# Altium PCB Atmaca.PcbDoc
Units mil, origin at the board's own origin, x right, y up, seen from the top; angles counter-clockwise.
Board outline 2506.53 x 2012.01 mil, 2 copper layers (Top Layer, Bottom Layer); 28 components, 25 nets, 130 pads, 6 vias.
Unrouted connection lines stored in the file: 21.
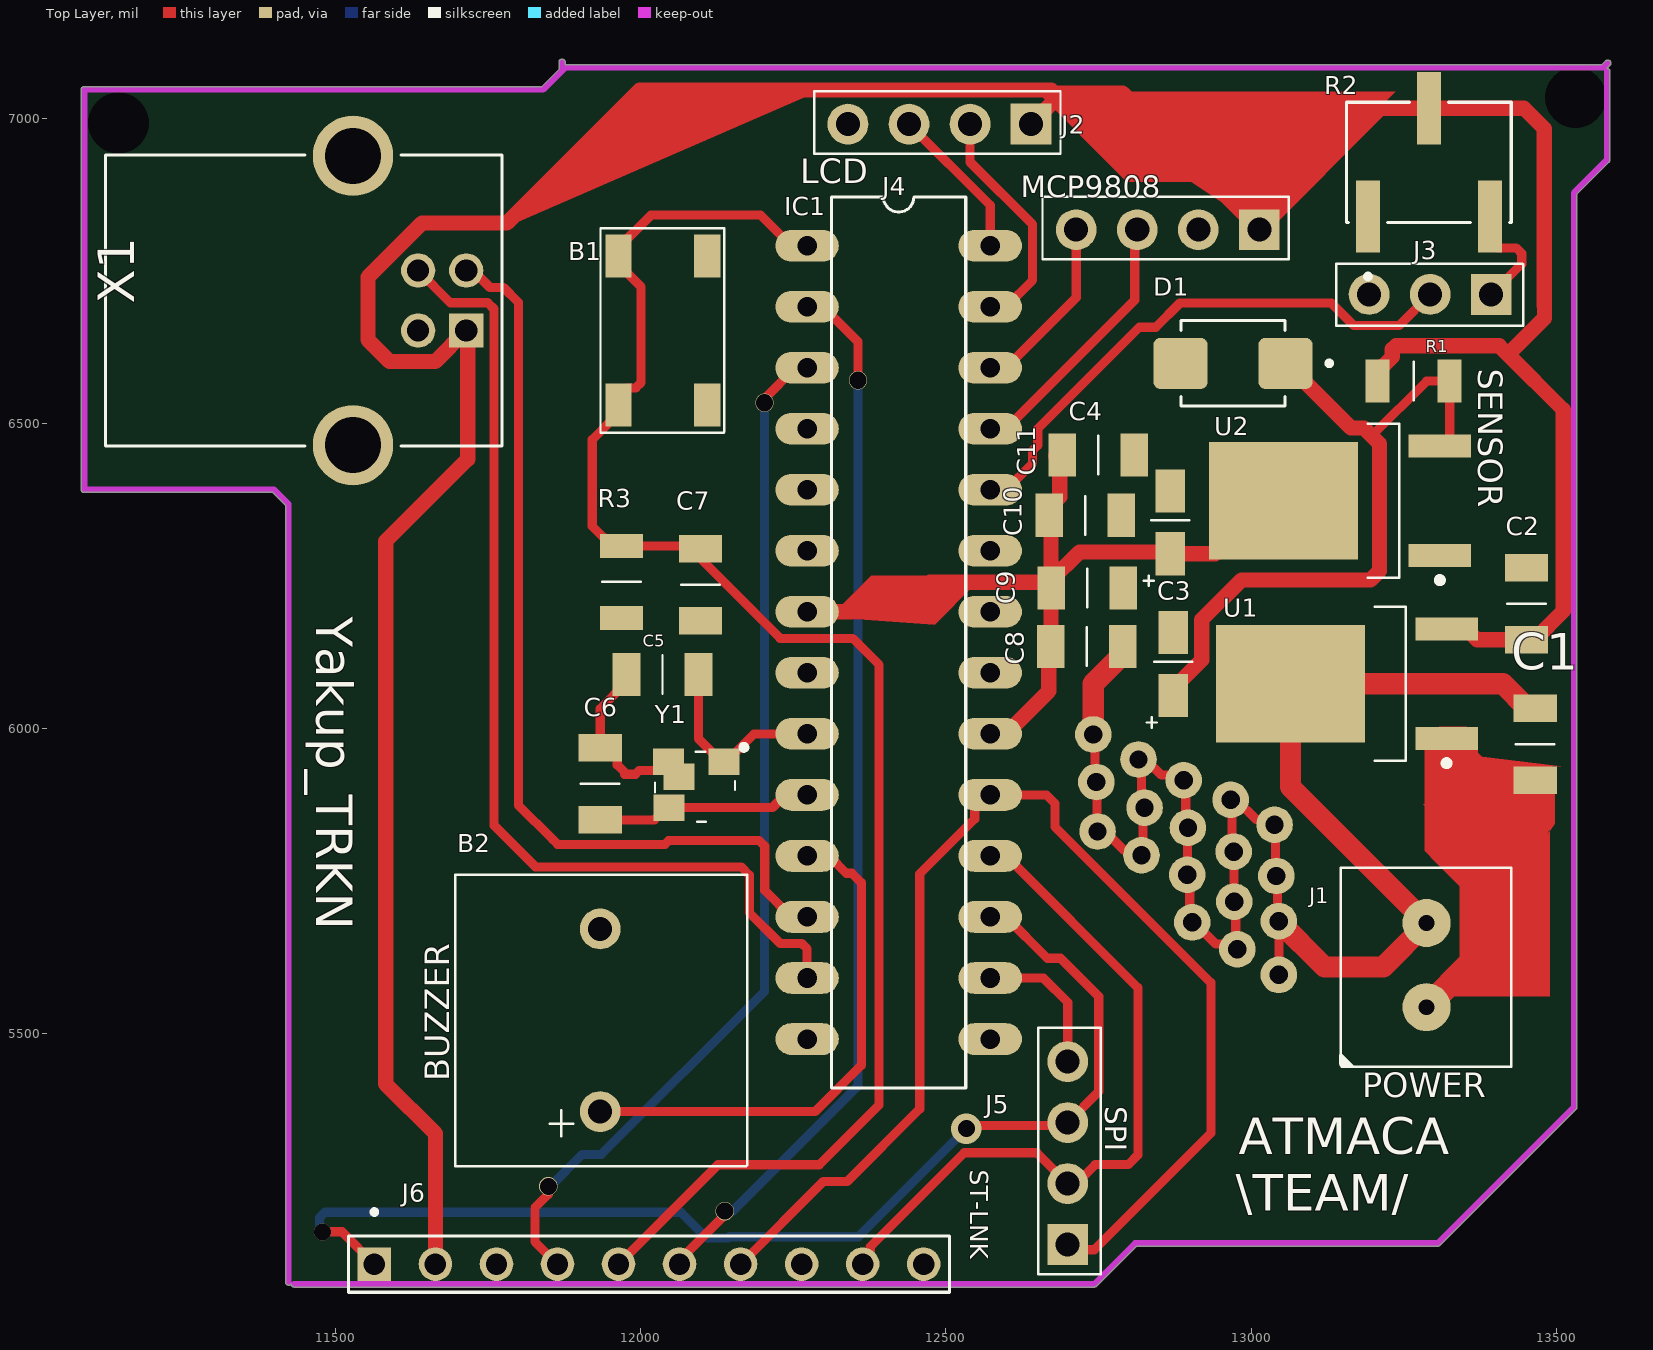
[diagram p0: Top Layer view]
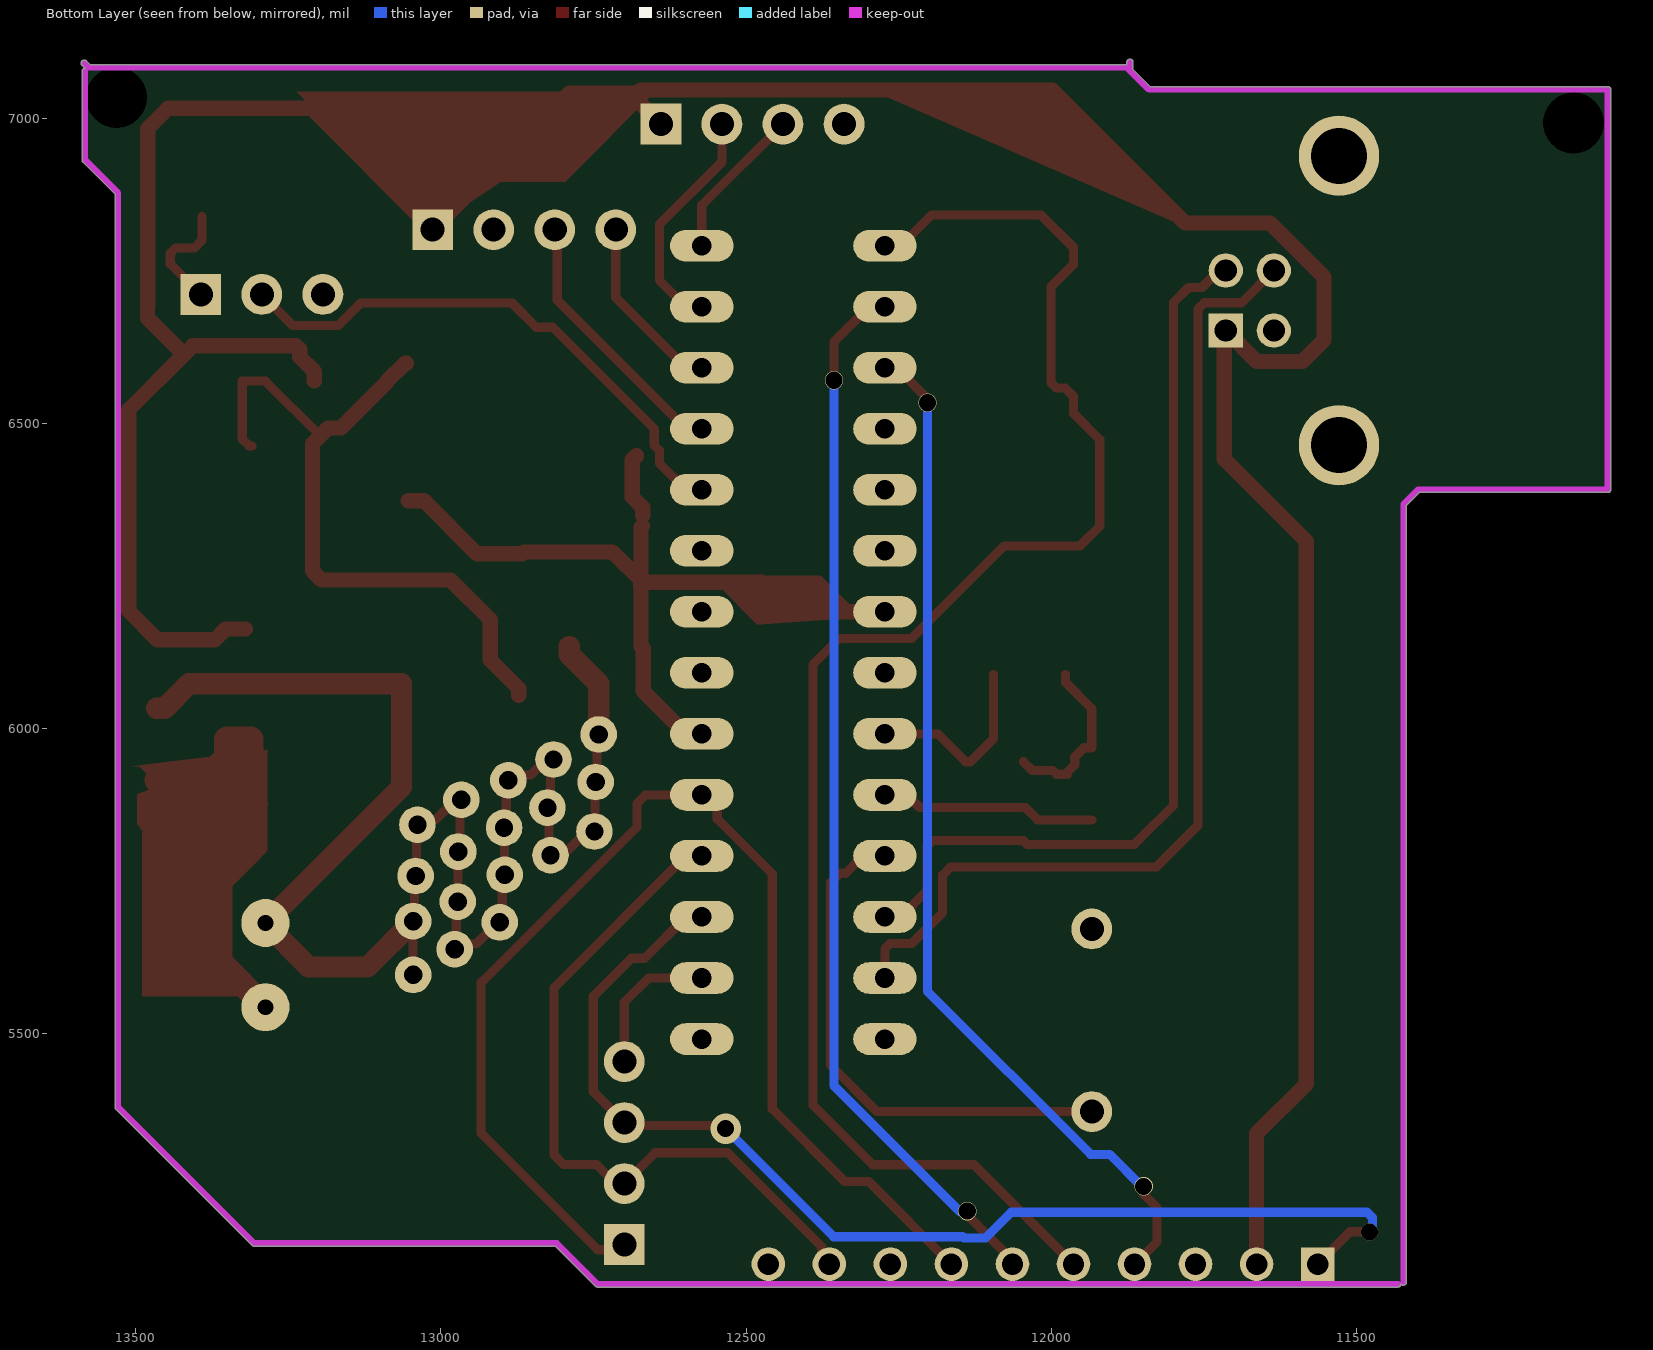
[diagram p1: Bottom Layer view, seen from below]
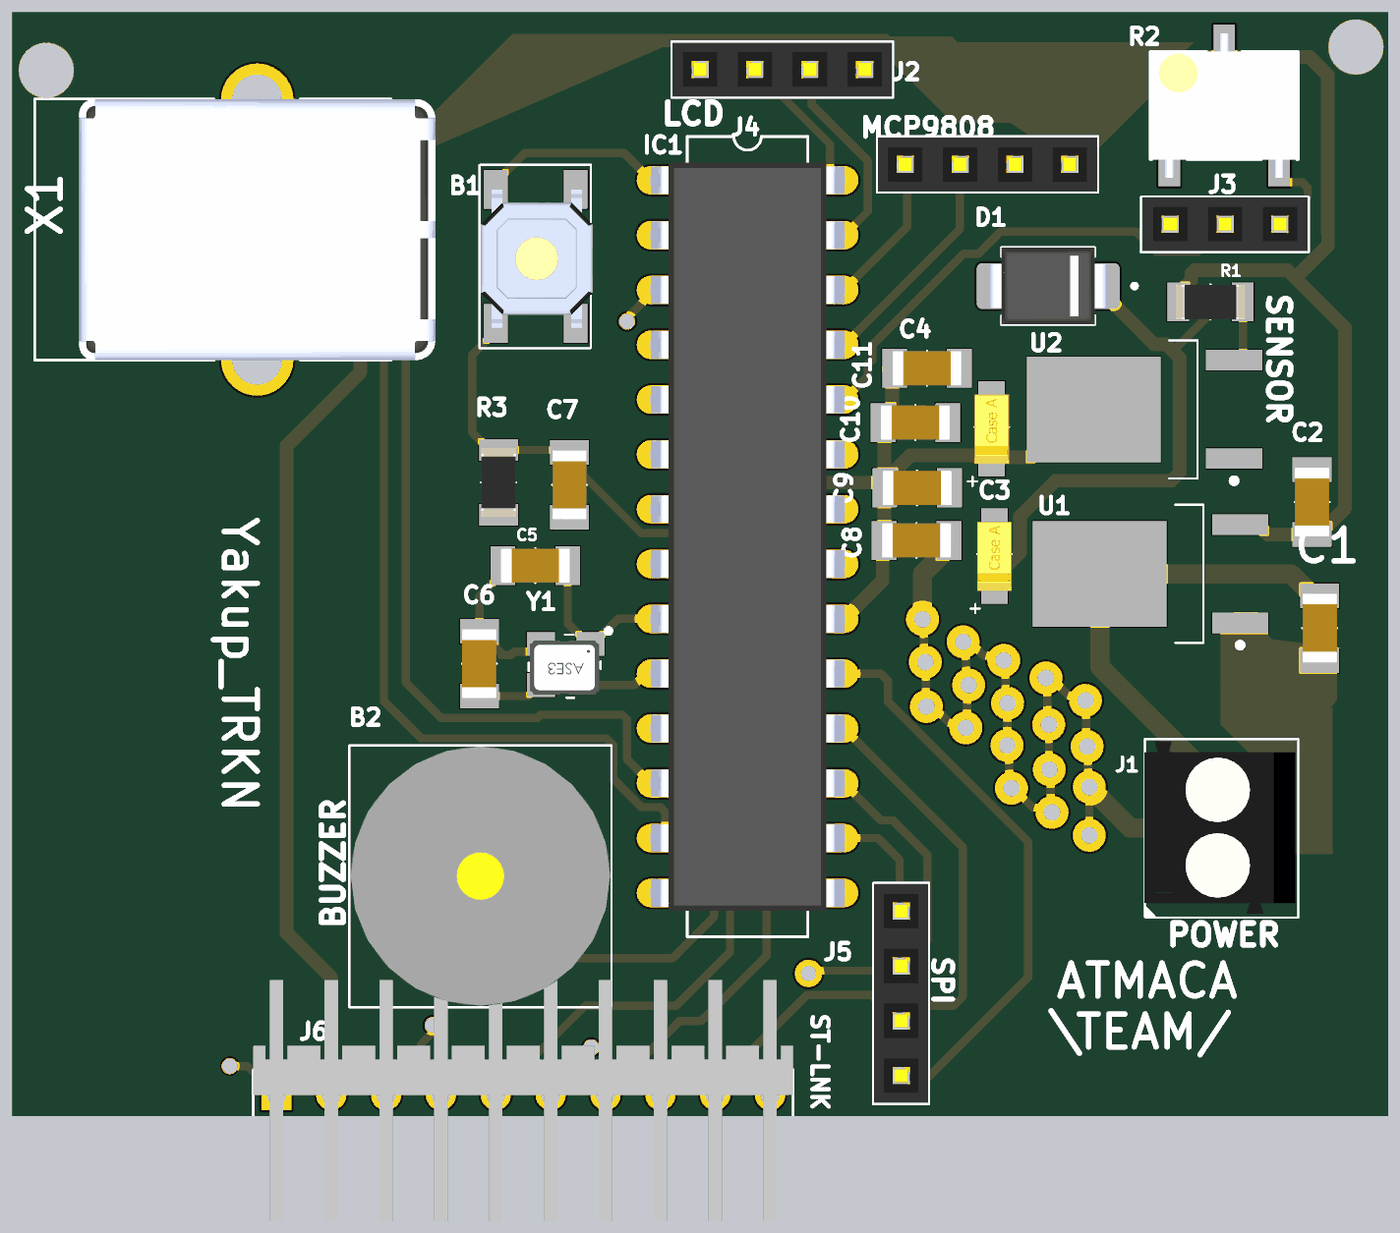
[diagram p2: 3D render of the assembled board from above, using the file's embedded part models]

## Layer stack, top to bottom
Top Solder: solder mask 0.4, Solder Resist, Dk 3.5
Top Layer: signal copper 1.4
Dielectric 1: dielectric 12.6, FR-4, Dk 4.8
Bottom Layer: signal copper 1.4
Bottom Solder: solder mask 0.4, Solder Resist, Dk 3.5

## Board outline
11088,6386.98 11396.92,6386.98 11417.99,6365.92 11417.99,5093 ccw(c11423,5093) 11426.99,5089.96 ccw(c11432,5090) 11432,5084.98 12743,5084.98 ccw(c12743,5090) 12746.56,5086.47 12746.55,5086.45 12812.08,5151.98 13306,5151.98 ccw(c13306,5157) 13309.56,5153.47 13309.55,5153.45 13532.55,5376.45 13532.53,5376.44 ccw(c13529,5380) 13534.01,5380 13534.01,6875.92 13586.55,6928.45 13586.53,6928.44 ccw(c13583,6932) 13588.01,6932 13588.01,7077 ccw(c13583,7077) 13583.11,7082.01 13588.05,7086.95 ccw(c13584.5,7090.5) 13589.51,7090.5 ccw(c13584.5,7090.5) 13580.95,7094.05 13574.92,7088.02 11876.01,7088.02 11876.01,7092 ccw(c11871,7092) 11865.99,7092 11865.99,7083 ccw(c11871,7083) 11866.57,7080.66 11837.92,7052.02 11088,7052.02 ccw(c11088,7047) 11082.99,7047 11082.99,6392 ccw(c11088,6392)

## Design rules (kind name [scope] priority, off if disabled: settings)
Clearance [All] p1: gap=0 ignorepadtopadclearanceinfootprint=FALSE
HoleSize [All] p1: absolutevalues=TRUE maxlimit=100 minlimit=0.1 maxpercent=80.000 minpercent=20.000
HoleToHoleClearance [All] p1: gap=0 allowstackedmicrovias=TRUE
MinimumSolderMaskSliver [All] p1: minsoldermaskwidth=0.1
PolygonConnect [All] p1: connectstyle=Relief reliefconductorwidth=10 reliefentries=4 polygonreliefangle="90 Angle" airgapwidth=10
RoutingVias [All] p1: holewidth=28 width=50 viastyle="Through Hole" minholewidth=28 minwidth=50 maxholewidth=28 maxwidth=50
SilkToSilkClearance [All] p1: silktosilkclearance=0.1
SilkToSolderMaskClearance [IsPad] p1: minsilkscreentomaskgap=0 clearancetoexposedcopper=TRUE
SolderMaskExpansion [All] p1: expansion=4 istentingtop=FALSE
Width [All] p1: maxlimit=40 minlimit=10 preferedwidth=15
25 further rules are at their usual default settings.

## Components (designator, comment, footprint, x,y, rotation, side; value= is the part's Value field where it differs from the comment)
B1 "Push Button" "PUSB BUTTON-SMD" 11963.5,6530.41 r90 top
B2 "Buzzer 5v" "Buzzer 5v" 11933.5,5372.5 r90 top
C1 "330 nF_1206" C1206 13485.19,5997.08 r270 top
C2 "330 nF_1206" C1206 13471.19,6227.19 r270 top
C3 "10 uF - Tantal" "C1206- TANTAL" 12872.5,6109.5 r90 top
C4 "10 uF - Tantal" "C1206- TANTAL" 12867.5,6341.5 r90 top
C5 "10 uF" C1206 12058.19,6068.81 r180 top
C6 "10 uF" C1206 11913.81,5886.92 r90 top
C7 "0.1 uF_1206" C1206 12117.5,6258.5 r270 top
C8 "0.1 uF_1206" C1206 12753.19,6114.81 r180 top
C9 "0.1 uF_1206" C1206 12754.19,6210.81 r180 top
C10 "0.1 uF_1206" C1206 12751.08,6329.81 r180 top
C11 "0.1 uF_1206" C1206 12772.19,6428.81 r180 top
D1 "S1Z1SMB5919BT3G" DIOM5436X247N 12970.48,6598.5 r180 top
IC1 "ATMEGA328P-PN" DIL28 12422.5,6141.41 r0 top
J1 "Klemens 1x2 3.5mm" "Klemens 1x2 - 3.5mm" 13285.53,5606.7 r90 top
J2 "Header 2.54 1x4" "Header 2.54 1x4" 12993.82,6788.96 r180 top
J3 "Header 2.54 1x3" "Header 2.54 1x3" 13393.5,6710.52 r180 top
J4 "Header 2.54 1x4" "Header 2.54 1x4" 12619.82,6961.96 r180 top
J5 "Header 2.54 1x4" "Header 2.54 1x4" 12670.96,5174.19 r90 top
J6 "6-146278-0" TE_6-146278-0 12013.5,5122.5 r0 top
R1 "1K R1206" "R1206 Resıstor" 13263.5,6569.5 r0 top
R2 "TS63Y500KT20" TRIM_TS63Y500KT20 13291.5,6927.92 r90 top
R3 "10K_1206" "R1206 Resıstor" 11968.5,6237.5 r90 top
U1 "L7805-DPAK" DPAK228P972X230-3N 13157.02,6073.5 r180 top
U2 "LD108633 DPAK" DPAK228P972X230-3N 13146.02,6373.5 r180 top
X1 "USB-B1HSB6" OST_USB-B1HSB6 11528.5,6701.5 r270 top
Y1 "8 MHz 12.5_pf Osc" "8 MHZ Osc." 12097.5,5926.5 r180 top

## Footprints (in the part's own frame and the unit in brackets; to place one, negate y for a bottom-side part, rotate by r counter-clockwise, add the part's x,y. Pads: shape width x height; smd on the part's side, far side on the other; paste and mask are expansions set on the pad)
"8 MHZ Osc." [mm]
  rect 1.3x1.1 smd mask+0.05: 1(-0.981,-0.49) 2(1.319,-0.49) 3(1.303,1.417) 4(0.889,0.127)
  silkscreen extent -1.91,-1.19 1.88,2.01, body extent -1.38,-0.64 1.82,1.86, height 1.22
"Buzzer 5v" [mm]
  round 1.7 hole 1 mask+0.05: 1(0,0) 2(7.6,0)
  silkscreen extent -2.27,-6.12 9.85,6.02, body extent -2.2,-6.05 9.8,5.95, height 9.5
C1206 [mm]
  rect 1.15x1.8 smd mask+0.05: 1(-0.925,-0.5) 2(2.075,-0.5)
  silkscreen extent 0.58,-1.3 0.58,0.31, body extent -1.02,-1.3 2.18,0.3, height 1
"C1206- TANTAL" [mm]
  rect 1.8x1.23 smd mask+0.05: 1(-1.4,0) 1(-1.4,0) 2(1.22,0)
  silkscreen extent -2.74,-0.8 0,1.1, body extent -1.7,-0.8 1.5,0.8, height 1.62
DIL28 [mil]
  oval 104x52 hole 32: 1(-150,650) 2(-150,550) 3(-150,450) 4(-150,350) 5(-150,250) 6(-150,150) 7(-150,50) 8(-150,-50) 9(-150,-150) 10(-150,-250) 11(-150,-350) 12(-150,-450) 13(-150,-550) 14(-150,-650) 15(150,-650) 16(150,-550) 17(150,-450) 18(150,-350) 19(150,-250) 20(150,-150) 21(150,-50) 22(150,50) 23(150,150) 24(150,250) 25(150,350) 26(150,450) 27(150,550) 28(150,650)
  silkscreen extent -110,-730 110,730, body extent -200,-682 200,683, height 180
DIOM5436X247N [mm]
  rrect25% 2.25x2.12 smd: A(2.185,0) C(-2.185,0)
  silkscreen extent -4.1,-1.78 2.16,1.78, body extent -2.72,-1.78 2.72,1.78, height 2.46
DPAK228P972X230-3N [mm] "D-PAK, 3-Pads, Body 6,40x6,56mm (max), IPC Medium Density"
  rect 2.6x0.95 smd mask+0.05: 1(-4.15,2.28) 2(-4.15,-2.28)
  rect 6.2x4.9 smd mask+0.05: 3(2.35,0)
  silkscreen extent -4.28,-3.2 -1.15,3.43, body extent -2.5,-3.2 4.1,3.2, height 2.3
"Header 2.54 1x3" [mm]
  rect 1.7x1.7 hole 1 mask+0.05: 1(0,-0.025)
  round 1.7 hole 1 mask+0.05: 2(2.54,-0.025) 3(5.08,-0.025)
  silkscreen extent -1.33,-1.3 6.45,1.28, body extent -1.26,-1.27 6.36,1.23, height 9.1
"Header 2.54 1x4" [mm]
  rect 1.7x1.7 hole 1 mask+0.05: 1(-0.5,-0.725)
  round 1.7 hole 1 mask+0.05: 2(2.04,-0.725) 3(4.58,-0.725) 4(7.12,-0.725)
  silkscreen extent -1.73,-2.1 8.52,0.5, body extent -1.68,-2.05 8.48,0.45, height 9.1
"Klemens 1x2 - 3.5mm" [mm]
  round 2 hole 0.65: 1(-1.6,-0.05) 2(1.9,-0.05)
  silkscreen extent -4.11,-3.58 4.2,3.58, body extent -3.9,-3.45 4.09,3.55, height 8.9
OST_USB-B1HSB6 [mm]
  rect 1.428x1.428 hole 0.92: 1(1.25,4.71)
  round 1.428 hole 0.92: 2(-1.25,4.71) 3(-1.25,2.71) 4(1.25,2.71)
  round 3.346 hole 2.33: P1(-6.02,0) P2(6.02,0)
  silkscreen extent -6.05,-10.3 6.05,6.2, body extent -7.42,-8.25 7.42,8.25, height 10.9
"PUSB BUTTON-SMD" [mm]
  rect 1.8x1.1 smd mask+0.05: 1(0,0) 2(6.2,0) 3(0,-3.7) 4(6.2,-3.7)
  silkscreen extent -1.15,-4.4 7.35,0.75, body extent -0.2,-4.5 6.2,0.7, height 1.5
"R1206 Resıstor" [mm]
  rect 1x1.8 smd mask+0.05: 1(-1.425,0) 2(1.575,0)
  silkscreen extent 0.08,-0.8 0.08,0.81, body extent -1.52,-0.8 1.68,0.81, height 0.55
TE_6-146278-0 [mm]
  rect 1.398x1.398 hole 0.89: 1(-11.43,0)
  round 1.398 hole 0.89: 2(-8.89,0) 2(1.27,0) 3(-6.35,0) 4(-3.81,0) 5(-1.27,0) 7(3.81,0) 8(6.35,0) 9(8.89,0) 10(11.43,0)
  silkscreen extent -12.5,-1.17 12.5,2.27, body extent -12.5,-5.84 12.5,5.33, height 1.17
TRIM_TS63Y500KT20 [mm]
  rect 3x1 smd: 1(-2.25,2.54) 2(2.25,0) 3(-2.25,-2.54)
  silkscreen extent -4.85,-3.42 2.5,3.42, body extent -3.35,-3.42 3.35,3.42, height 8

## Part data
B1: "Smd Push Button", Satın Alma Linki=https://urun.n11.com/diger/mini-pushbutton-switch-smd-P227461537?gclid=Cj0KCQjwkoDmBRCcARIsAG3xzl8Y_-jeD7HocNM6lvuZ_rVp83568XPGtNzlPwXWLph8oCRqo0yh87UaApZYEALw_wcB&gclsrc=aw.ds
C1 C2: library part "330 nF C1206", "330 nF C1206"
C7 C8 C9 C10 C11: library part "0.1 uF C1206", "0.1 uF C1206"
D1: "Zener Diode 5.6V 3W Â±5% Surface Mount SMB", Package=None, Availability=Unavailable, MF="{'manufacturer': u'ON Semiconductor'}", MP=S1Z1SMB5919BT3G, Price=None
IC1: "Atmel ATmega48/88/168/328 AVR Microcontroller", Package=None, Availability=Unavailable, MF="{'manufacturer': u'Microchip'}", MP=ATMEGA328P-PN, Price=None
J6 R2: Package=None, Availability=Unavailable, Price=None
  J6: MF="{'manufacturer': u'TE Connectivity'}", MP=6-146278-0
  R2: MF="{'manufacturer': u'Vishay Dale'}", MP=TS63Y500KT20
R3: library part "10K R1206", "10K R1206"
U1: "L7805 5V REGULATOR. SMD PAKET"
U2: "LD1086 3.3V REGULATOR"
X1: "Conn Usb Type b r/a Black", Package=None, Availability=Unavailable, MF="{'manufacturer': u'On Shore'}", MP=USB-B1HSB6, Price=None
Y1: library part "8 MHz 12.5 pf Osc", "8 MHz 12.5 pf Osc"

## Free pads (board coordinates)
  round 0 hole 100: 5(11144,6992) 5(13531.5,7034.5)
  round 60 hole 30: 6(12741.5,5990.5) 7(12746.5,5912.5) 8(12748.5,5831.5) 9(12895.5,5760.5) 10(12903.5,5682.5) 11(12815.5,5949.5) 12(12825.5,5870.5) 13(12820.5,5792.5) 14(12972.5,5716.5) 15(12889.5,5915.5) 16(12896.5,5837.5) 17(12971.5,5798.5) 18(12966.5,5883.5) 19(12977.5,5638.5) 20(13038.5,5842.5) 21(13041.5,5758.5) 22(13045.5,5684.5) 23(13045.5,5596.5)

## Via types
v1: diameter 30, hole 28, Top Layer to Bottom Layer, 4 vias
v2: diameter 50, hole 28, Top Layer to Bottom Layer, 1 vias
v3: diameter 28, hole 28, Top Layer to Bottom Layer, 1 vias

## Nets (pads, with @x,y where several pads share a name; then routed paths per layer and width w, separated by ;. In a path a pad name is that pad's centre, name@x,y a point inside that pad or via, vN(x,y) a via of type N, cw(c..) or ccw(c..) an arc to the next point about the centre after c; other vN are vias at no path point)
3.3V: R3.1
+3.3V: C4.1 C8.2 C9.2 C10.2 C11.2 IC1.7 IC1.20 U2.3 | length 1376.2
  Top Layer w25: IC1.7 12425.41,6191.41 12473.91,6239.91 C9.2@12662.36,6239.91 ; IC1.20 12598.5,5991.41 12668.66,6061.57 12668.66,6131.66 C8.2 12672,6135 C9.2@12672,6230.27 ; C10.2 12669.39,6362.3 12686.5,6379.41 12686.5,6440.5 C11.2@12679.5,6447.5 ; C10.2@12669.94,6332.06 12672,6330 12672,6239.91 12672,6231 C9.2 12672.5,6243.3 12718.7,6289.5 12864.38,6289.5 12867.5,6286.38 12940.79,6286.38 13027.91,6373.5 U2.3 ; C11.2@12679.39,6446.5 C11.2@12686.5,6439.39
+5V: C2.2 J2.1 J4.1 J6.2@11663.5,5122.5 R1.1 R2.2 U1.2 X1.1 | length 5566.1
  Top Layer w25: J6.2@11663.5,5122.5 11663.5,5336.5 11582,5418 11582,6307 11716.5,6441.5 11716.5,6649.72 X1.1 11663.32,6601.68 11588.32,6601.68 11552.86,6637.14 11552.86,6739.95 11641.41,6828.5 11780.5,6828.5 11998.46,7046.46 12647.5,7046.46 12672.5,7046.46 ; J4.1 12681.5,7032.5 12672.5,7041.5 12681.5,7041.5 12699.5,7041.5 12789.5,7041.5 J2.1 13212.5,7016.5 R2.2 13446.97,7016.5 13480.5,6982.97 13480.5,6693.5 13480.64,6693.36 13480.64,6672.64 13421,6613 ; R1.1 13207.4,6585.25 13231.5,6609.35 13231.5,6621.5 13237.43,6627.43 13406.57,6627.43 13421,6613 ; U1.2 13352.89,6163.26 13370.65,6145.5 C2.2 13464.3,6145.5 13511.5,6192.7 13511.5,6522.5 13421,6613
+9V: C1.2 J1.1 U1.1 | length 864.5
  Top Layer w40: J1.1 13361.5,5617.7 13361.5,5942.64 ; 13356.87,5768.13 13310.5,5814.5 13310.5,5982.44 13311.8,5983.74 U1.1 13350.29,5983.74 13351.59,5982.44 13351.59,5952.56 13361.5,5942.64 ; C1.2 13388.75,5915.39 13361.5,5942.64
A1: IC1.24 J3.2 | length 912.3
  Top Layer w15: IC1.24 12598.5,6391.41 12642,6434.91 12642,6456 12650.36,6464.36 12650.36,6491.18 12816.91,6657.73 12843.73,6657.73 12883.5,6697.5 13131.5,6697.5 13168.46,6660.54 13242.54,6660.54 J3.2
A2: IC1.25 J2.3 | length 441.2
  Top Layer w15: IC1.25 12598.5,6491.41 12809.5,6702.41 12809.5,6813.5 J2.3
A3: IC1.26 J2.4 | length 299.7
  Top Layer w15: IC1.26 12598.5,6591.41 12713.5,6706.41 J2.4
AIN1: IC1.13 X1.3 | length 1677.2
  Top Layer w15: X1.3 11688.01,6697.9 11749.29,6697.9 11759.54,6687.65 11759.54,5841.46 11827.5,5773.5 12164.5,5773.5 12178,5760 12178,5698.39 12228.48,5647.91 12263.71,5647.91 12272.5,5639.12 IC1.13
AINO: IC1.12 X1.2 | length 1527.8
  Top Layer w15: X1.2 11725.09,6750.71 11752.9,6722.9 11775.1,6722.9 11799.5,6698.5 11799.5,5874.5 11855.51,5818.49 11863.64,5810.36 12039.45,5810.36 12045.58,5816.5 12194.21,5816.5 12203,5807.71 12203,5734.91 12246.5,5691.41 IC1.12
GND: B1.3 B1.4 B2.2 C1.1 C2.1 C4.2 C7.2 C8.1 C9.1 C10.1 C11.1 D1.A IC1.8 IC1.22 J1.2 J2.2 J3.3 J4.4 J6.3 J6.8 J6.10 pad.6 pad.7 pad.8 pad.9 pad.10 pad.11 pad.12 pad.13 pad.14 pad.15 pad.16 pad.17 pad.18 pad.19 pad.20 pad.21 pad.22 pad.23 R2.1 U1.3 U2.1 X1.4 | length 2786.4
  Top Layer w15: pad.6 12744,5988 12744,5915 pad.7 12747.5,5911.5 12747.5,5832.5 pad.8 12760.68,5831.5 12791.07,5801.11 12811.89,5801.11 pad.13 12823,5795 12823,5868 pad.12 12820.5,5875.5 12820.5,5944.5 pad.11 12827.68,5949.5 12853.07,5924.11 12880.89,5924.11 pad.15 12893,5912 12893,5841 pad.16 12896,5837 12896,5761 pad.9 12899.5,5756.5 12899.5,5686.5 pad.10 12906.97,5682.5 12942.36,5647.11 12968.89,5647.11 pad.19@12975,5641 ; pad.19 pad.19@12975,5641 ; pad.23 pad.22 13043.5,5686.5 13043.5,5756.5 pad.21 13040,5760 13040,5841 pad.20 13029.89,5851.11 13008.36,5851.11 12975.97,5883.5 pad.18 12969,5881 12969,5801 pad.17 12972,5798 12972,5717 pad.14 12975,5714 pad.19@12975,5641
  Top Layer w35: pad.6 12741.5,6073.59 12789.61,6121.7 C8.1 ; pad.22 13120.5,5609.5 13216.5,5609.5 13287.5,5680.5 J1.2 13064.5,5904.5 U1.3 13412.7,6073.5 13452.7,6033.5 C1.1
IN: C5.1 IC1.9 Y1.1 | length 317.5
  Top Layer w15: C5.1 12094.61,5983.36 12132.19,5945.78 Y1.1 12140.07,5945.78 12185.69,5991.41 IC1.9
MISO: IC1.18 J5.2 J6.9 | length 1181.9
  Top Layer w15: J6.9 12363.5,5133.33 12375.87,5145.7 12375.87,5150.87 12530,5305 12649,5305 J5.2 12713.55,5254.5 12744.7,5285.65 12798.86,5285.65 12814.5,5301.29 12814.5,5575.41 12598.5,5791.41 IC1.18
MOSI: IC1.17 J5.3 J6.1 | length 1917.2
  Top Layer w15: v3(11478.5,5175.5) 11510.5,5175.5 J6.1 ; v2(12533.5,5344.5) 12538.5,5349.5 12694.5,5349.5 J5.3 12750.46,5405.46 12750.46,5561.01 12687.79,5623.69 12666.22,5623.69 12598.5,5691.41 IC1.17
  Bottom Layer w15: v3(11478.5,5175.5) 11473.5,5180.5 11473.5,5198.71 11482.29,5207.5 12065.5,5207.5 12107.5,5165.5 12142.83,5165.5 12144.85,5167.52 12356.52,5167.52 v2(12533.5,5344.5)
NetB2_1: B2.1 IC1.11 | length 865.7
  Top Layer w15: B2.1 12285.5,5372.5 12361.5,5448.5 12361.5,5747.5 12345.89,5763.11 12336.81,5763.11 12308.51,5791.41 IC1.11
NetC3_1: C3.1 D1.C R1.2 U2.2 | length 1166.7
  Top Layer w15: 13197.68,6479.64 13287.54,6569.5 R1.2 13325.51,6474.46 13314.31,6463.26 U2.2
  Top Layer w25: C3.1@12872.5,6054.38 12872.5,6065.6 12919.21,6112.31 12919.21,6178.54 12984.18,6243.5 13195.86,6243.5 13210.5,6258.14 13210.5,6466.82 13197.68,6479.64 13184.87,6492.46 13163.54,6492.46 13088.29,6567.71 13088.29,6569.27 13059.06,6598.5 D1.C
NetC5_2: C5.2 C6.2 Y1.2 Y1.4 | length 285.7
  Top Layer w15: C5.2 11976.5,6075.7 11933.5,6032.7 C6.2 11946.3,5968.61 11961.43,5953.47 11961.43,5940.68 11973.5,5928.61 11973.5,5925.29 11991.15,5925.29 11997.49,5931.63 12031.43,5931.63 Y1.2
NetJ3_1: J3.1 R2.3 | length 188
  Top Layer w15: R2.3 13391.5,6799.96 13403.69,6787.78 13434.22,6787.78 13443.5,6778.5 13443.5,6761.5 J3.1
OUT: C6.1 IC1.10 Y1.3 | length 355.9
  Top Layer w15: C6.1 12022.06,5850.5 12042.25,5870.7 Y1.3 12215.78,5870.7 12236.49,5891.41 IC1.10
RESET: B1.1 B1.2 C7.1 IC1.1 J6.5 R3.2 | length 2685.3
  Top Layer w15: J6.5 12126.5,5285.5 12292.5,5285.5 12390.5,5383.5 12390.5,6104.5 12347.09,6147.91 12228.48,6147.91 12076.88,6299.51 R3.2 11952.75,6299.51 11920.5,6331.76 11920.5,6473.63 11963.5,6516.63 B1.1 11963.5,6544.19 11977.65,6558.34 11991.71,6558.34 12000.5,6567.13 12000.5,6723.72 11963.5,6760.72 B1.2 11963.5,6788.28 12016.72,6841.5 12196.41,6841.5 12246.5,6791.41 IC1.1
RXD: IC1.2 J6.2@12063.5,5122.5 | length 1747.5
  Top Layer w15: J6.2@12063.5,5122.5 12063.5,5128.89 12137.62,5203.01 v1(12137.62,5209.4) ; IC1.2 12298.5,6691.41 12355.93,6633.98 v1(12355.93,6570.84)
  Bottom Layer w15: v1(12137.62,5209.4) 12150.04,5209.4 12150.22,5209.22 12355.93,5414.93 v1(12355.93,6570.84)
SCK: IC1.19 J5.1 J6.7 | length 2041.4
  Top Layer w15: J6.7 12299,5258 12338,5258 12457,5377 12457,5762 12547.16,5852.16 12547.16,5874.31 12564.25,5891.41 12664.59,5891.41 12678.48,5877.52 12678.48,5839.52 12934.21,5583.79 12934.21,5337.21 12743,5146 12708,5146 J5.1
SCL: IC1.28 J4.3 | length 254.2
  Top Layer w15: J4.3 12572.5,6857.5 IC1.28
SDA: IC1.27 J4.2 | length 385.6
  Top Layer w15: J4.2 12539.5,6928.5 12642,6826 12642,6734.91 12598.5,6691.41 IC1.27
SS: IC1.16 J5.4 | length 240.5
  Top Layer w15: IC1.16 12659.59,5591.41 12699.5,5551.5 J5.4
TXD: IC1.3 J6.4 | length 1700.4
  Top Layer w15: v1(11848.5,5250) 11848.5,5237.03 11826.5,5215.03 11826.5,5159.5 J6.4 ; v1(12202.82,6533.99) 12202.82,6540.86 12253.37,6591.41 IC1.3
  Bottom Layer w15: v1(11848.5,5250) 11852,5250 11904.29,5302.29 11935.37,5302.29 12202.82,5569.75 v1(12202.82,6533.99)
pads on no net: C3.2 IC1.4 IC1.5 IC1.6 IC1.14 IC1.15 IC1.21 IC1.23 X1.P1 X1.P2

## Keep-outs
Keep-Out Layer:
  lines w10: 11423,5093 11423,6368 11399,6392 11088,6392 11088,7047 11840,7047 11876,7083 11895,7083 13577,7083 13584.5,7090.5 ; 11432,5090 12743,5090 12761,5108 12810,5157 13306,5157 13529,5380 13529,6878 13583,6932 13583,7077 ; 11871,7083 11871,7092

## Other copper
Top Layer:
  region net +3.3V: 12309.5,6182.5 12377.5,6250.5 12547.5,6250.5 12547.5,6236.5 12481.5,6170.5
  region net +5V: 11767.5,6816.5 11989.5,7038.5 12277.5,7038.5
  region net +5V: 12908.5,6896.5 12796.5,6896.5 12643.5,7049.5 12715.5,7049.5
  region net +5V: 12670.5,7050.5 12677.5,7043.5 13236.5,7043.5 13018.5,6825.5 13007.5,6825.5
  region net +9V: 13284.5,5965.5 13284.5,5799.5 13346.5,5737.5 13468.5,5859.5 13470.5,5859.5 13470.5,5914.5 13494.5,5938.5 13507.5,5938.5
  region net +9V: 13324.5,5971.5 13338.5,5957.5 13338.5,5929.5
  region: 13534.5,5764.5
  region net +9V: 13489.5,5836.5 13383.5,5730.5 13364.5,5730.5 13364.5,5676.5 13396.5,5644.5
  region: 13546.5,5761.5
  region net +9V: 13497.5,5844.5 13489.5,5836.5 13489.5,5561.5 13308.5,5561.5 13280.5,5533.5
  region net +9V: 13497.5,5892.5 13497.5,5844.5 13368.5,5715.5 13294.5,5789.5 13294.5,5970.5 13295.5,5970.5 13296.5,5969.5
  region net +9V: 13417.5,5917.5 13362.5,5862.5 13362.5,5701.5
  region: 13455.5,5823.5
  region net +9V: 13431.5,5894.5 13361.5,5824.5 13361.5,5797.5 13282.5,5876.5
  region: 13411.5,5858.5
  region net +9V: 13386.5,5898.5 13329.5,5841.5 13329.5,5958.5 13340.5,5947.5 13340.5,5793.5 13300.5,5833.5 13300.5,5935.5 13318.5,5953.5

## Silkscreen, mask and mechanical layers (free items; w line width, h text height)
Top Overlay:
  text "LCD" at 12261,6894 h40
  text "MCP9808" at 12623,6871 h35
  text "SENSOR" at 13372,6590 h40 r270
  text "Yakup_TRKN" at 11468,6183 h60 r270
  text "BUZZER" at 11686,5422 h40 r90
  text "POWER" at 13182,5396 h40
  text "SPI" at 12761,5381 h35 r270
  text "ATMACA" at 12980,5303 h60
  text "ST-LNK" at 12540,5277 h30 r270
  text "\TEAM/" at 12975,5210 h60
Mechanical 1:
  pour cut-out: 11251.5,5985.5